# Altium PCB TTL-USB CH340G.PcbDoc.pcbdoc
Units mm, origin at the board's own origin, x right, y up, seen from the top; angles counter-clockwise.
Board outline 27.71 x 40.96 mm, 2 copper layers (Top Layer, Bottom Layer), stack 1.071 mm thick; 16 components, 153 nets, 62 pads, 7 vias.
Unrouted connection lines stored in the file: 5.
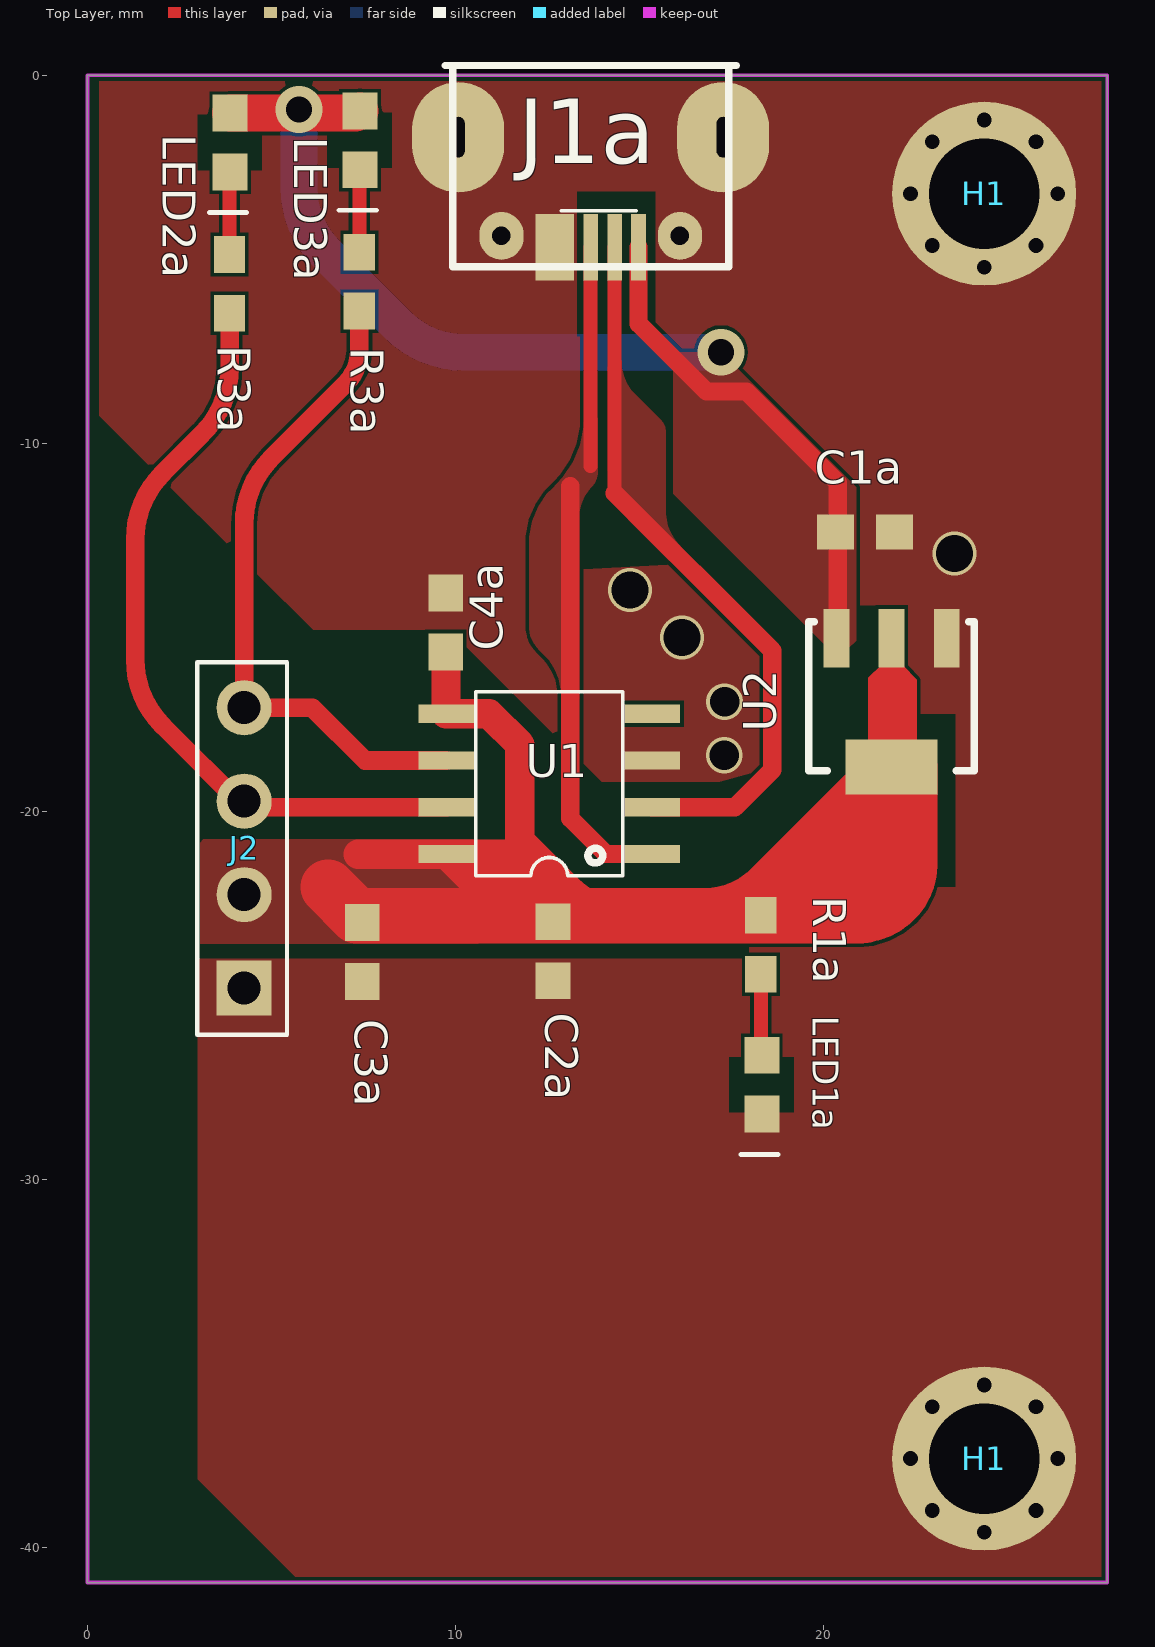
[diagram p0: Top Layer view]
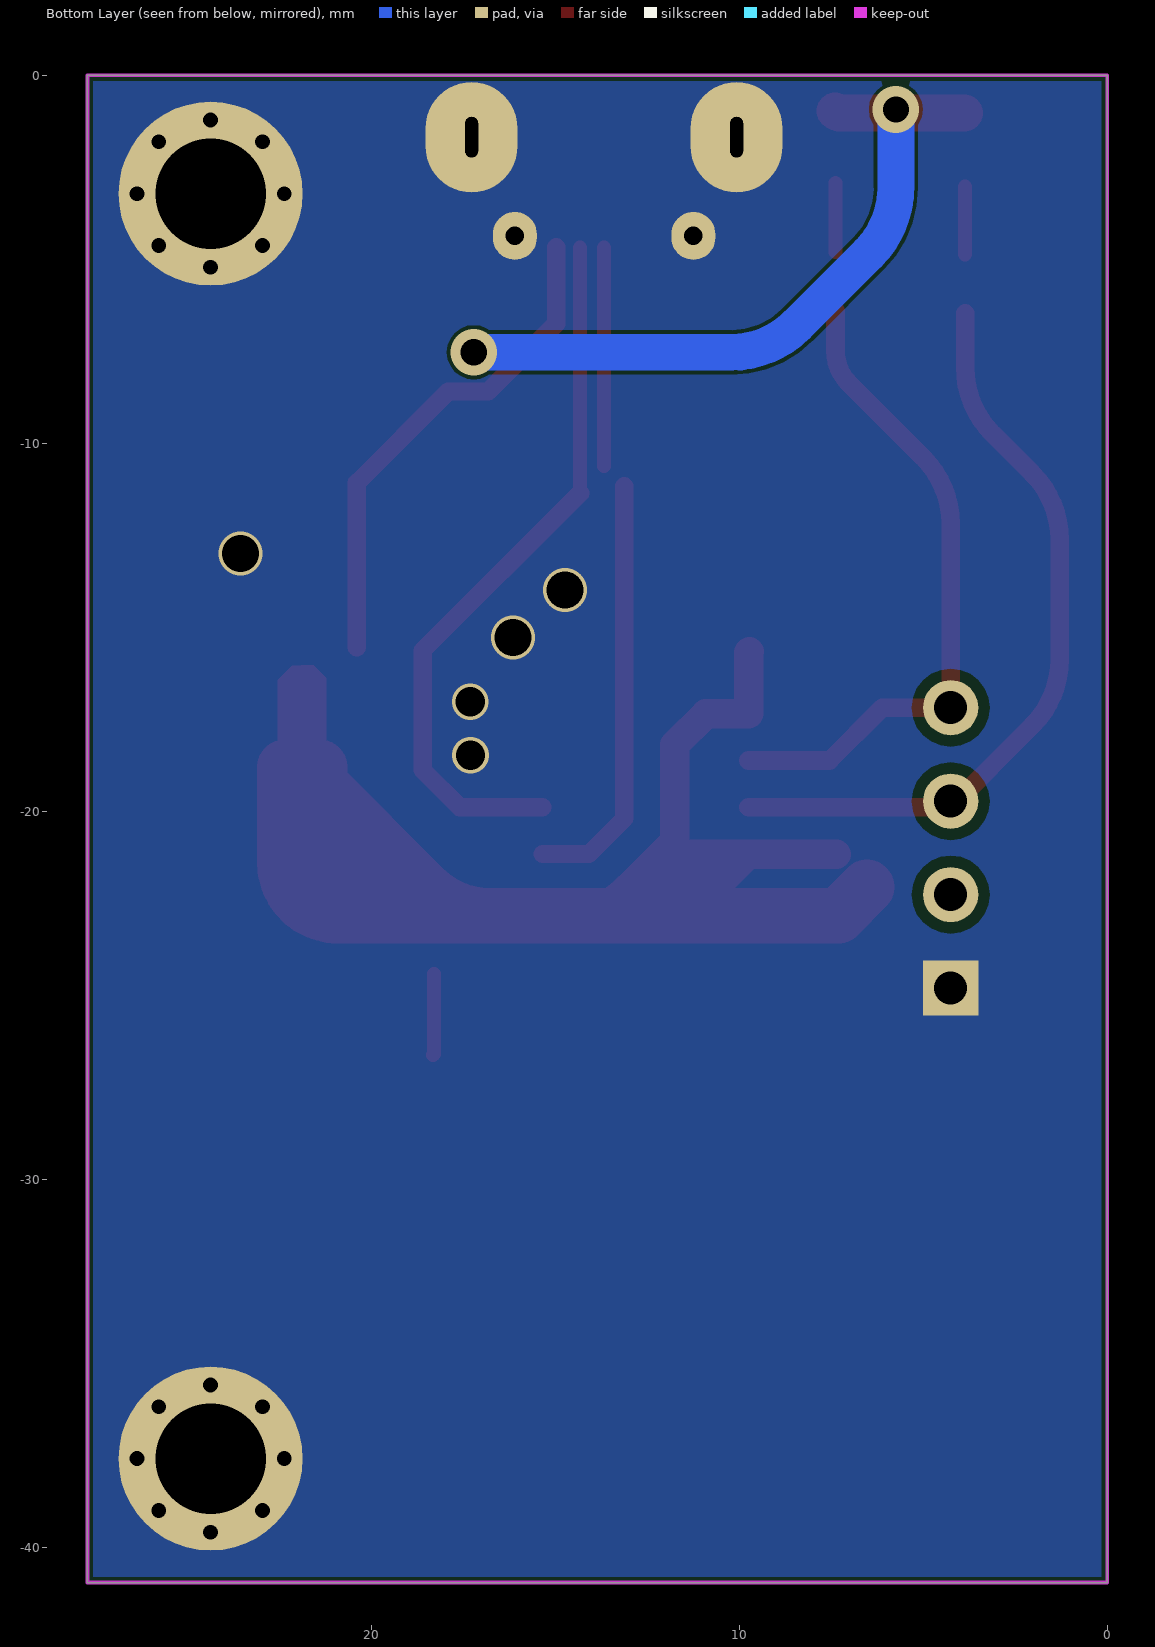
[diagram p1: Bottom Layer view, seen from below]
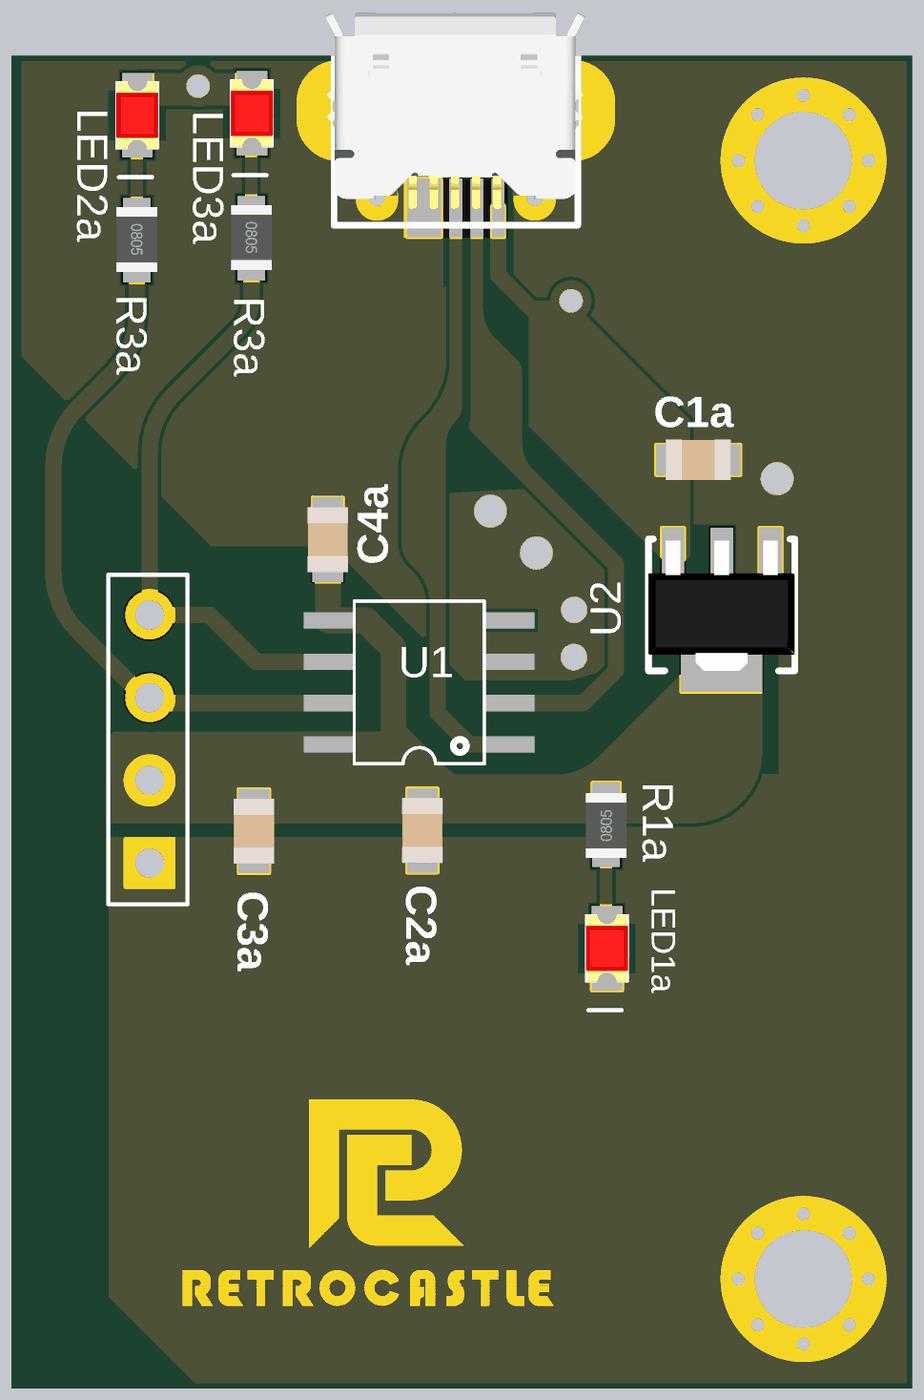
[diagram p2: 3D render of the assembled board from above, using the file's embedded part models]

## Layer stack, top to bottom
Top Solder: solder mask 0.0102, Solder Resist, Dk 3.5
Top Layer: signal copper 0.0356
Dielectric 1: dielectric 1, FR-4, Dk 4.8
Bottom Layer: signal copper 0.0356
Bottom Solder: solder mask 0.0102, Solder Resist, Dk 3.5

## Board outline
0,-40.958 27.711,-40.958 27.711,0 0,0

## Design rules (kind name [scope] priority, off if disabled: settings)
BoardOutlineClearance [All] p1: gap=0 ignorepadtopadclearanceinfootprint=FALSE
Clearance keep-out_clearance [InNamedPolygon('ground') vs OnLayer('Keep-Out Layer')] p1: gap=0.1 ignorepadtopadclearanceinfootprint=FALSE
Clearance [(InComponent('U1') OR InComponent('U2'))] p2: gap=0.1 ignorepadtopadclearanceinfootprint=TRUE
Clearance Clearance_1 [All] p3: gap=0.1 ignorepadtopadclearanceinfootprint=TRUE except(0.3: Arc-THPad Track-THPad SMDPad-THPad THPad-THPad THPad-Fill THPad-Poly THPad-Region)
ComponentClearance [All] p1 off: gap=0.254 collisioncheckmode=3 verticalgap=0.254 showdistances=FALSE
Height [All] p1 off: minheight=0 maxheight=25.4 prefheight=12.7
HoleSize [All] p1: absolutevalues=TRUE maxlimit=6 minlimit=0.025 maxpercent=80.000 minpercent=20.000
MinimumSolderMaskSliver [InComponent('U*')] p1: minsoldermaskwidth=0.2
MinimumSolderMaskSliver MinimumSolderMaskSliver_1 [All] p2: minsoldermaskwidth=0.25
PolygonConnect PolygonConnect_1 [InNet('NetFB*')] p1: connectstyle=Direct reliefconductorwidth=0.762 reliefentries=4 polygonreliefangle="90 Angle" airgapwidth=0.254
PolygonConnect PolygonConnect_2 [IsVia] p2: connectstyle=Direct reliefconductorwidth=0.762 reliefentries=4 polygonreliefangle="90 Angle" airgapwidth=0.254
PolygonConnect [not IsVia] p3: connectstyle=Direct reliefconductorwidth=1 reliefentries=4 polygonreliefangle="90 Angle" airgapwidth=0.254
RoutingVias [All] p1: holewidth=0.4 width=1 viastyle="Through Hole" minholewidth=0.4 minwidth=0.9 maxholewidth=0.4 maxwidth=1
SilkToSolderMaskClearance [IsPad] p1 off: minsilkscreentomaskgap=0.127 clearancetoexposedcopper=TRUE
SolderMaskExpansion SolderMaskExpansion_U1 [InComponent('U1')] p1: expansion=0 istentingtop=FALSE
SolderMaskExpansion [All] p2: expansion=0.051 istentingtop=FALSE
Width Width_power [InNetClass('power')] p1: maxlimit=2 minlimit=0.254 preferedwidth=0.508 minimp=50.000000 maximp=50.000000 favimp=50.000000
Width Width_signal [All] p2: maxlimit=2 minlimit=0.254 preferedwidth=0.254 minimp=50.000000 maximp=50.000000 favimp=50.000000
25 further rules are at their usual default settings.

## Classes and differential pairs
net class power: GND VCC

## Components (designator, comment, footprint, x,y, rotation, side; value= is the part's Value field where it differs from the comment)
C1a "10UF" C0805 21.129,-12.418 r0 top value=10uF (schematic designator C1)
C2a "10UF" C0805 12.645,-23.806 r270 top value=10uF (schematic designator C1)
C3a "100NF" C0805 7.466,-23.826 r270 top value=10uF (schematic designator C1)
C4a "100NF" C0805 9.735,-14.87 r90 top value=10uF (schematic designator C1)
H1 "" M3 24.365,-3.22 r0 top
H1 "" M3 24.365,-37.589 r0 top
J1a "P1a" "MICROUSB SMT V1 - OX" 13.674,-4.677 r180 top
J2 "Comment" HDR2.54-1X4P 4.257,-19.727 r90 top
LED1a "0603LED GREEN" LEDR0603 18.323,-27.43 r270 top
LED2a "0603LED  BLUE" LEDR0603 3.878,-1.832 r270 top
LED3a "0603LED RED" LEDR0603 7.402,-1.771 r270 top
R1a "2.2K" R0805 18.297,-23.628 r90 top (schematic designator R3)
R3a "1K" R0805 3.862,-5.672 r270 top (schematic designator R3)
R3a "1K" R0805 7.387,-5.611 r270 top (schematic designator R3)
U1 "1881" SOIC-8(3.9-4.9) 12.548,-19.257 r90 top
U2 "LM1117F-3.3V" SOT89 21.85,-17.052 r270 top locked

## Footprints (in the part's own frame and the unit in brackets; to place one, negate y for a bottom-side part, rotate by r counter-clockwise, add the part's x,y. Pads: shape width x height; smd on the part's side, far side on the other; paste and mask are expansions set on the pad)
C0805 [mm] "Capacitor, Chip; 2.35 mm L X 1.35 mm W X 1.00 mm H body"
  rect 1x0.95 smd: 1(-0.8,0) 2(0.8,0)
  body extent -1,-0.62 1,0.63, height 0.58
HDR2.54-1X4P [mm] "Header, Vertical, 2.54 mm pitch; 0.65 mm lead width, 2 pins, 1 row, 2 pins per row, 5.08 mm L X 2.54 mm W X 11.00 mm H body"
  rect 1.5x1.5 hole 0.9 paste-1.5: 1(-5.08,0)
  round 1.5 hole 0.9 paste-1.5: 2(-2.54,0) 2(0,0) 2(2.54,0)
  silkscreen extent -6.35,-1.16 3.78,1.27
LEDR0603 [mm] "LED, Chip; 2.35 mm L X 1.35 mm W X 1.00 mm H body"
  rect 1x0.95 smd: 1(-0.8,0) 2(0.8,0)
  Top Layer pour cut-out: -0.762,0.878 0.762,0.878 0.762,-0.9 -0.762,-0.9
  silkscreen extent 1.9,-0.57 1.9,0.45, body extent -1.05,-0.67 1.05,0.68, height 0.89
M3 [mm] "Mounting Hole, Plated; 5.00 mm Pad, 3.00 mm Hole (with 8 vias)"
  round 0.6 hole 0.4 paste-0.6 mask-0.6: 1(-2,0) 1(-1.41,-1.41) 1(-1.41,1.41) 1(0,-2) 1(1.41,-1.41) 1(1.41,1.41) 1(2,0)
  round 5 hole 3: 1(0,0)
  round 0.6 hole 0.4 paste-0.4 mask-0.4: 1(0,2)
"MICROUSB SMT V1 - OX" [mm]
  rect 1.05x1.8 smd: 2(0.975,0)
  rect 0.4x1.8 smd: 3(0,0) 4(-0.65,0) 5(-1.3,0)
  oval 2.5x3 hole 0.35 slot 1.1 at 90 deg: 5(-3.6,-2.99) 5(3.6,-2.99)
  oval 1.2x1.3 hole 0.5: 5(-2.425,-0.31) 5(2.425,-0.31)
  silkscreen extent -3.95,-4.94 3.95,0.53, body extent -3.97,-6.03 4.03,0.02, height 2.65
R0805 [mm] "Resistor, Chip; 2.32 mm L X 1.25 mm W X 1.00 mm H body"
  rect 1x0.85 smd: 1(-0.8,0) 2(0.8,0)
  body extent -1.03,-0.62 0.97,0.63, height 0.42
SOIC-8(3.9-4.9) [mm] "SOP16"
  rect 0.5x1.5 smd mask+0: 1(-1.905,-2.8) 2(-0.635,-2.8) 3(0.635,-2.8) 4(1.905,-2.8) 5(1.905,2.8) 6(0.635,2.8) 7(-0.635,2.8) 8(-1.905,2.8)
  silkscreen extent -2.5,-2 2.5,2
SOT89 [mm] "SOT89"
  rect 1.6x0.7 smd mask+0.051: 1(-1.75,1.5) 3(-1.75,-1.5) ""(-1.75,0)
  rect 1.5x2.5 smd mask+0.051: 2(1.75,0)
  Top Layer region: -0.676,-0.629 -1.021,-0.284 -1.021,0.065 1.502,0.065 1.502,-0.629
  Top Layer region: -0.622,0.689 -1.001,0.31 -1.002,-0.031 1.492,-0.031 1.492,0.689
  silkscreen extent -2.2,-2.25 1.85,2.25, body extent -2.15,-2.25 1.85,2.25, height 1.5

## Part data
C1a C2a C3a C4a: library part C0805, "Ceramic Chip Capacitor - Standard", PackageDocument=Mar-2001, Code_IPC=2012[0805], Code_JEITA=0805, ComponentLink1Description="Manufacturer Link", ComponentLink1URL=http://www.kemet.com/, ComponentLink2Description=Datasheet, ComponentLink2URL=http://www.kemet.com/kemet/web/homepage/kechome.nsf/vapubfilesname/F3102TA.pdf/$file/F3102TA.pdf, DatasheetDocument=Mar-2001, LatestRevisionDate=19-Mar-2004, LatestRevisionNote="Silkscreen size reduced.", Note="Footprint corresponds to dimensions for bulk cassette packaging. This case size has tightened tolerances.", PackageReference=0805, Published=17-Jul-2002, Publisher="Altium Limited"
H1 H1: library part M3
R1a R3a R3a: library part ERJ6RS, "Low Ohmic Value Thick Film Chip Resistor, 0.1 Ohm to 0.2 Ohm Range, 1%, 2% and 5% Tolerance, 0805 Size, 0.125 W", PackageDocument=Mar-2003, Code_IPC="2012 [0805]", ComponentLink1Description="Manufacturer Link", ComponentLink1URL=http://www.panasonic.com/industrial/components/resistive_products.htm, ComponentLink2Description=Datasheet, ComponentLink2URL=http://www.panasonic.com/industrial/components/pdf/AOA0000CE3.pdf, LatestRevisionDate=19-Mar-2004, LatestRevisionNote="Silkscreen size reduced.", PackageReference=6-0805, Published=17-Dec-2003, Publisher="Altium Limited"

## Via types
v1: diameter 1.2, hole 1, Top Layer to Bottom Layer, tented both sides, 3 vias
v2: diameter 1.27, hole 0.711, Top Layer to Bottom Layer, tented both sides, 2 vias
v3: diameter 1, hole 0.8, Top Layer to Bottom Layer, tented both sides, 2 vias

## Nets (pads, with @x,y where several pads share a name; then routed paths per layer and width w, separated by ;. In a path a pad name is that pad's centre, name@x,y a point inside that pad or via, vN(x,y) a via of type N, cw(c..) or ccw(c..) an arc to the next point about the centre after c; other vN are vias at no path point)
3.3V: LED1a.1 R1a.1 | length 2.2
  Top Layer w0.38: R1a.1 18.297,-26.604 LED1a.1
4FSC: 
5V: C1a.1 J1a.5@14.974,-4.677 LED2a.1 LED3a.1 U2.3 | length 33.1
  Top Layer w0.5: J1a.5@14.974,-4.677 14.974,-6.751 16.819,-8.597 17.907,-8.597 20.389,-11.079 U2.3@20.389,-15.551
  Top Layer w1: LED2a.1 7.255,-1.032 ccw(c7.255,-0.823) LED3a.1
  Bottom Layer w1: v2(5.747,-0.933) 5.747,-3.052 ccw(c8.287,-3.052) 6.49,-4.848 8.43,-6.787 ccw(c10.226,-4.991) 10.226,-7.531 v2(17.216,-7.531)
B: 
b2: 
b3: 
b4: 
b5: 
b6: 
BT: 
btn_osd: 
btn_reset: 
btn_user: 
C: 
CLK: 
CMD: 
CSET: 
CTS: 
CV: 
CVSET: 
D+: J1a.3 U1.1 | length 17.6
  Top Layer w0.38: 13.674,-10.623 J1a.3
  Top Layer w0.5: 13.121,-11.175 13.121,-20.198 14.086,-21.162 U1.1
D-: J1a.4 U1.2 | length 19.7
  Top Layer w0.38: 14.324,-11.356 J1a.4
  Top Layer w0.5: 14.324,-11.356 18.605,-15.638 18.605,-18.88 17.593,-19.892 U1.2
DAT0: 
DAT1: 
DAT2: 
DAT3: 
DSR: 
DTR: 
G: 
g1: 
g2: 
g3: 
g4: 
g5: 
g6: 
GND: C1a.2 C2a.2 C3a.2 C4a.2 H1.1 J1a.2 J1a.5@10.074,-1.687 J1a.5@11.249,-4.367 J1a.5@16.099,-4.367 J1a.5@17.274,-1.687 J2.1 LED1a.2 U1.3 U2.1
  other v1: 16.153,-15.279 14.738,-13.991 23.556,-12.996
  other v3: 17.304,-18.478 17.312,-17.027
GT: 
HSync: 
IO6: 
led_disk: 
led_power: 
led_user: 
left: 
NetC1_2: 
NetC3_1: 
NetC5_1: 
NetC7_2: 
NetC8_2: 
NetC9_2: 
NetC10_2: 
NetIO6_3: 
NetJ2_1: 
NetJ3_9: 
NetJP2_1: 
NetJP2_2: 
NetJP3_1: 
NetJP_SOG_2: 
NetLED1_1: 
NetLED1_2: 
NetLED2_2: 
NetLED3_2: 
NetLED4_2: 
NetLED5_2: 
NetLED6_2: 
NetLED7_2: 
NetLED8_2: 
NetP1_2: 
NetP1_7: 
NetP1_19: 
NetP1_20: 
NetP1_21: 
NetP1_22: 
NetP1_23: 
NetP1_24: 
NetP1_25: 
NetP1_26: 
NetP1_27: 
NetP1_28: 
NetP1_31: 
NetP1_32: 
NetP1_33: 
NetP1_34: 
NetP1_35: 
NetP1_36: 
NetP1_37: 
NetP1_38: 
NetP1_39: 
NetP1_40: 
NetP6_4: 
NetP6_5: 
NetP7_1: 
NetP7_2: 
NetP7_5: 
NetP7_6: 
NetP7_7: 
NetP7_8: 
NetP7_10: 
NetPWR1_D+: 
NetPWR1_D-: 
NetPWR2_D+: 
NetPWR2_D-: 
NetQ1_1: 
NetQ1_2: 
NetR1_2: 
NetR3_1: 
NetR4_1: 
NetR5_1: 
NetR6_1: 
NetR7_1: 
NetR8_1: 
NetR9_1: 
NetR10_1: 
NetR12_1: 
NetU1_11: 
NetU1_12: 
NetU1_13: 
NetU1_14: 
NetU1_16: 
NetU1_17: 
NetU1_18: 
NetU1_19: 
NetU1_22: 
NetU1_23: 
NetU1_32: 
NetU1_33: 
NetU1_34: 
NetU1_35: 
NetU1_37: 
NetU1_38: 
R: 
r2: 
r3: 
r4: 
r5: 
r6: 
right: 
RT: 
RTS: 
RX: 
RXD: J2.2@4.257,-19.727 LED2a.2 R3a.1@3.862,-4.872 R3a.2@3.862,-6.472 U1.7 | length 22.7
  Top Layer w0.38: R3a.1@3.862,-4.872 LED2a.2@3.862,-3.027
  Top Layer w0.508: R3a.2@3.862,-6.472 3.862,-7.948 cw(c1.322,-7.948) 3.118,-9.744 2.041,-10.822 ccw(c3.837,-12.618) 1.297,-12.618 1.297,-15.876 ccw(c3.837,-15.876) 2.041,-17.672 4.257,-19.888 9.744,-19.888 U1.7
SOG: 
spdif: 
TVDET: 
TX: 
TXD: J2.2@4.257,-17.187 LED3a.2 R3a.1@7.387,-4.811 R3a.2@7.387,-6.411 U1.6 | length 19.9
  Top Layer w0.38: R3a.1@7.387,-4.811 LED3a.2@7.387,-2.928
  Top Layer w0.508: R3a.2@7.387,-6.411 7.387,-7.483 cw(c6.111,-7.483) 7.013,-8.386 5.001,-10.398 ccw(c6.797,-12.194) 4.257,-12.194 4.257,-17.187 6.112,-17.187 7.548,-18.622 U1.6
VBUS: 
VCC: C2a.1 C3a.1 C4a.1 J2.2@4.257,-22.267 R1a.2 U1.5 U1.8 U2. U2.2 | length 63
  Top Layer w0.8: 7.361,-21.166 12.028,-21.166 ; C4a.1 9.742,-15.677 9.742,-17.346 U1.5 10.91,-17.352 11.749,-18.191 11.749,-20.807 13.039,-22.097 ; 13.78,-22.839 13.485,-22.544 ; 15.394,-22.841 14.835,-22.841 cw(c14.835,-20.301) 14.727,-22.839 cw(c14.835,-20.301) 13.039,-22.097 ; 20.38,-22.962 20.38,-22.887 20.428,-22.839 ; U1.8@10.161,-21.162 cw(c10.161,-23.702) 11.957,-21.906 ; U1.8@10.161,-21.162 ccw(c11.957,-19.366) 11.957,-21.906 ; U1.8@10.161,-21.162 U1.8 10.386,-21.8 ccw(c12.182,-20.004) 12.182,-22.544 C2a.1@12.595,-22.544 ; 11.957,-21.906 C2a.1@12.595,-22.544 ; C2a.1@12.595,-22.544 13.485,-22.544 ; 13.039,-22.097 13.485,-22.544
  Top Layer w1.5: 6.532,-22.063 7.308,-22.839 13.78,-22.839 14.727,-22.839 16.867,-22.839 ; 15.394,-22.841 16.759,-22.841 ccw(c16.759,-20.301) 16.867,-22.839 ; 20.428,-22.839 21.401,-21.866 21.401,-20.658 ; 20.928,-22.839 ccw(c20.928,-21.417) 22.35,-21.417 U2.2@22.35,-18.802 ; 21,-22.839 R1a.2@18.168,-22.839 ; 16.867,-22.839 ccw(c16.759,-20.301) 18.555,-22.097 U2.2@21.401,-19.251 ; 16.867,-22.839 R1a.2@18.168,-22.839 ; R1a.2@18.168,-22.839 ccw(c18.168,-20.299) 19.964,-22.095 21.401,-20.658 ; 21.401,-20.658 U2.2@21.401,-19.251 ; U2.2@21.401,-19.251 21.401,-18.802 U2.2 U2.2@21.401,-19.251
VDD: 
VGA_PWR: 
VSync: 
Y: 
YSET: 
YTRAP: 
pads on no net: U1.4

## Polygon pours and split planes (outlines as drawn)
GND on Top Layer "GND_L01_P011" (solid, remove dead copper, pour order 11): 27.711,0 0.319,-0.004 0.319,-9.258 6.132,-15.071 9.84,-15.071 13.971,-19.202 17.176,-19.202 17.982,-20.008 17.982,-24.01 3.003,-24.01 3.003,-38.157 5.804,-40.958 27.711,-40.958
D+ on Top Layer "D+_L01_P010" (solid, remove dead copper, pour order 10): 13.497,-9.234 13.497,-9.309 cw(c10.957,-9.309) 12.753,-11.105 12.638,-11.22 ccw(c14.18,-12.762) 11.999,-12.762 11.999,-14.946 ccw(c12.976,-14.946) 12.285,-15.637 12.446,-15.797 cw(c11.416,-16.827) 12.872,-16.827 12.872,-16.891 ccw(c13.163,-16.891) 12.958,-17.097 ccw(c13.112,-16.942) 13.112,-17.16 13.241,-17.16 ccw(c12.95,-16.869) 13.362,-16.869 13.362,-11.982 cw(c14.473,-11.982) 13.688,-11.196 ccw(c13.265,-10.774) 13.863,-10.774 13.863,-9.341 ccw(c13.667,-9.341) 13.805,-9.203 cw(c13.733,-9.13) 13.733,-9.233 13.496,-9.233
D- on Top Layer "D-_L01_P007" (solid, remove dead copper, pour order 7): 14.222,-7.764 14.514,-7.764 14.518,-7.759 14.518,-7.826 ccw(c15.677,-7.826) 14.858,-8.645 15.555,-9.343 cw(c15.166,-9.732) 15.716,-9.732 15.716,-11.902 ccw(c16.907,-11.902) 16.065,-12.744 cw(c15.818,-12.991) 16.167,-12.991 16.167,-13.144 cw(c15.942,-13.144) 16.101,-13.303 cw(c16.101,-12.875) 15.798,-13.178 14.886,-12.266 cw(c16.682,-10.47) 14.142,-10.47 14.142,-7.915 cw(c14.291,-7.915) 14.186,-7.81 14.237,-7.759
5V on Top Layer "5V_L01_P006" (solid, remove dead copper, pour order 6): 15.913,-7.531 17.216,-7.531 20.884,-11.199 20.884,-15.363 20.67,-15.578 20.643,-15.551 20.096,-15.551 15.913,-11.369
VCC on Top Layer "VCC_L01_P004" (solid, remove dead copper, pour order 4): 3.068,-23.595 3.06,-20.765 10.487,-20.765 10.713,-20.991 10.713,-23.595
GND on Bottom Layer "ground" (solid, remove dead copper, pour order 2): 27.711,-40.958 27.711,0.112 0,0.112 0,-40.958

## Keep-outs
Keep-Out Layer:
  the board outline again, w0.1

## Other copper
Top Layer:
  pour cut-out: 18.019,-18.962 17.468,-19.512 16.525,-19.512 16.525,-19.388
  pour cut-out: 15.593,-13.117 15.772,-13.309 13.478,-13.431 13.478,-13.117
  pour cut-out: 23.594,-17.35 23.594,-22.071 22.307,-22.071 22.307,-17.35
  pour cut-out: 21.518,-14.402 21.518,-15.209 20.911,-15.209 20.911,-14.402
  pour cut-out: 15.443,-3.157 15.443,-7.103 13.293,-7.103 13.293,-3.157

## Silkscreen, mask and mechanical layers (free items; w line width, h text height)
Top Solder:
  drawing of 6694 lines, arcs and shapes, not listed